# Altium PCB Audio Amplifier 3W PAM8403 PCB.PcbDoc
Units mil, origin at the board's own origin, x right, y up, seen from the top; angles counter-clockwise.
Board outline 1181.1 x 1181.1 mil, 2 copper layers (Top Layer, Bottom Layer); 13 components, 16 nets, 48 pads, 11 vias.
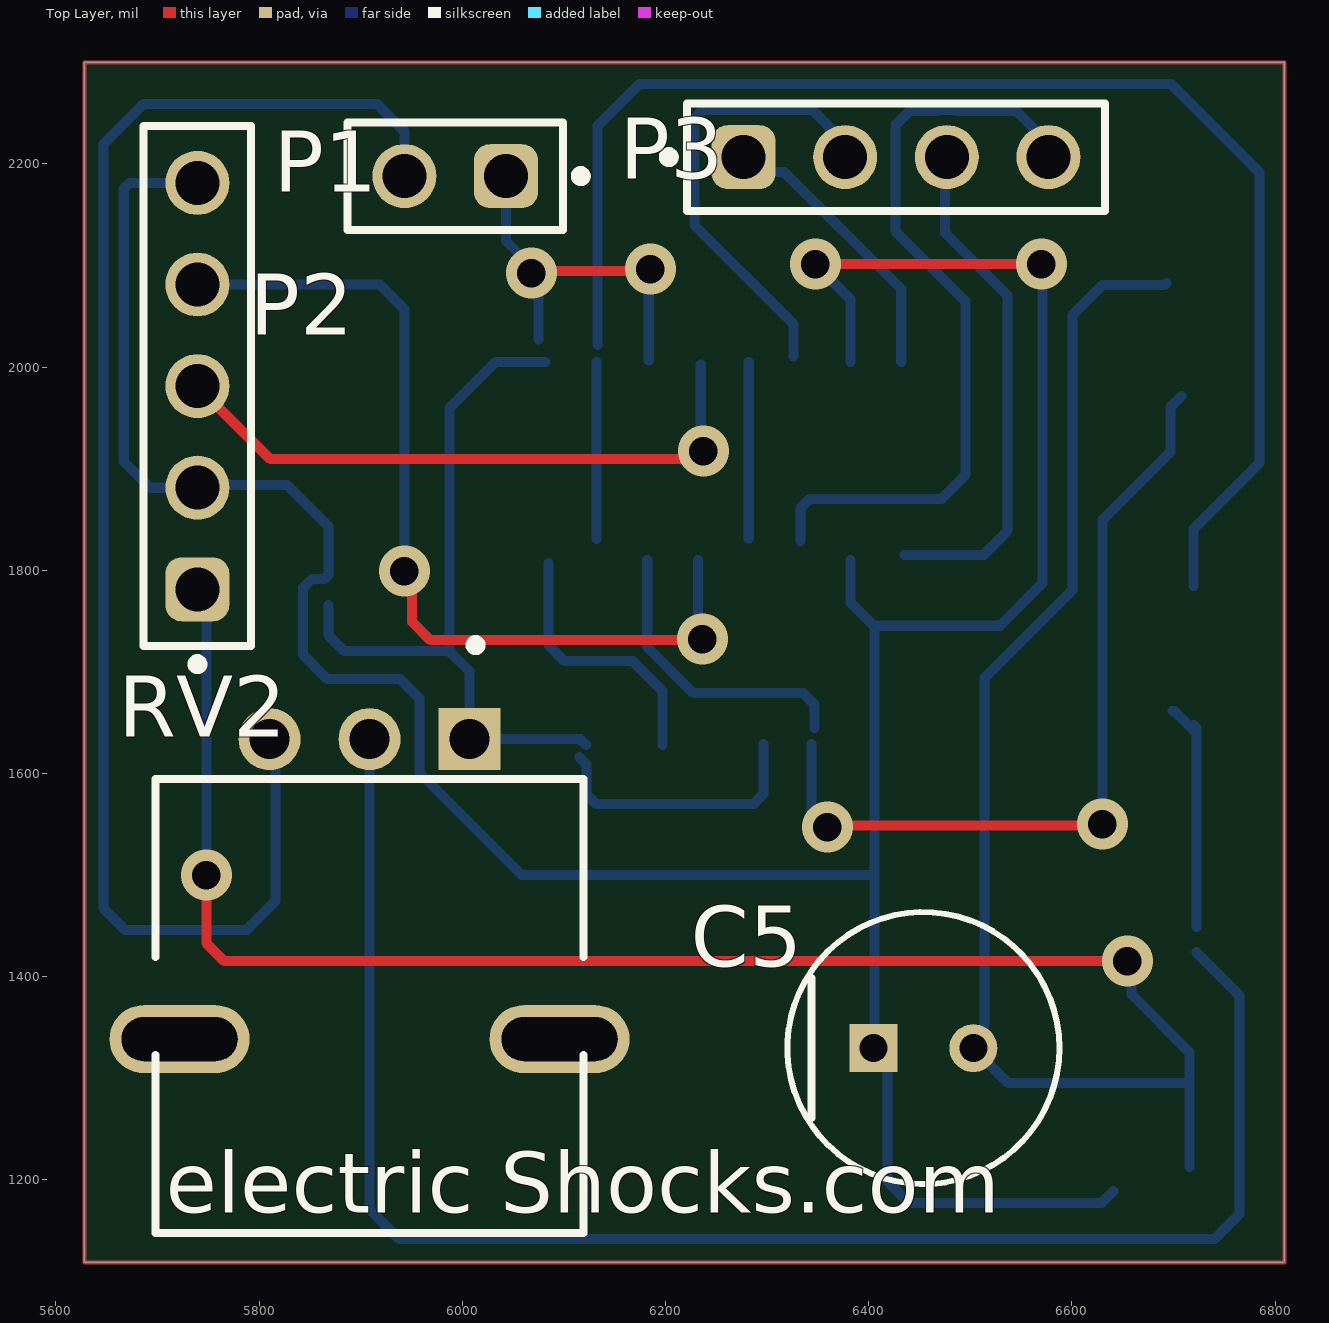
[diagram p0: Top Layer view]
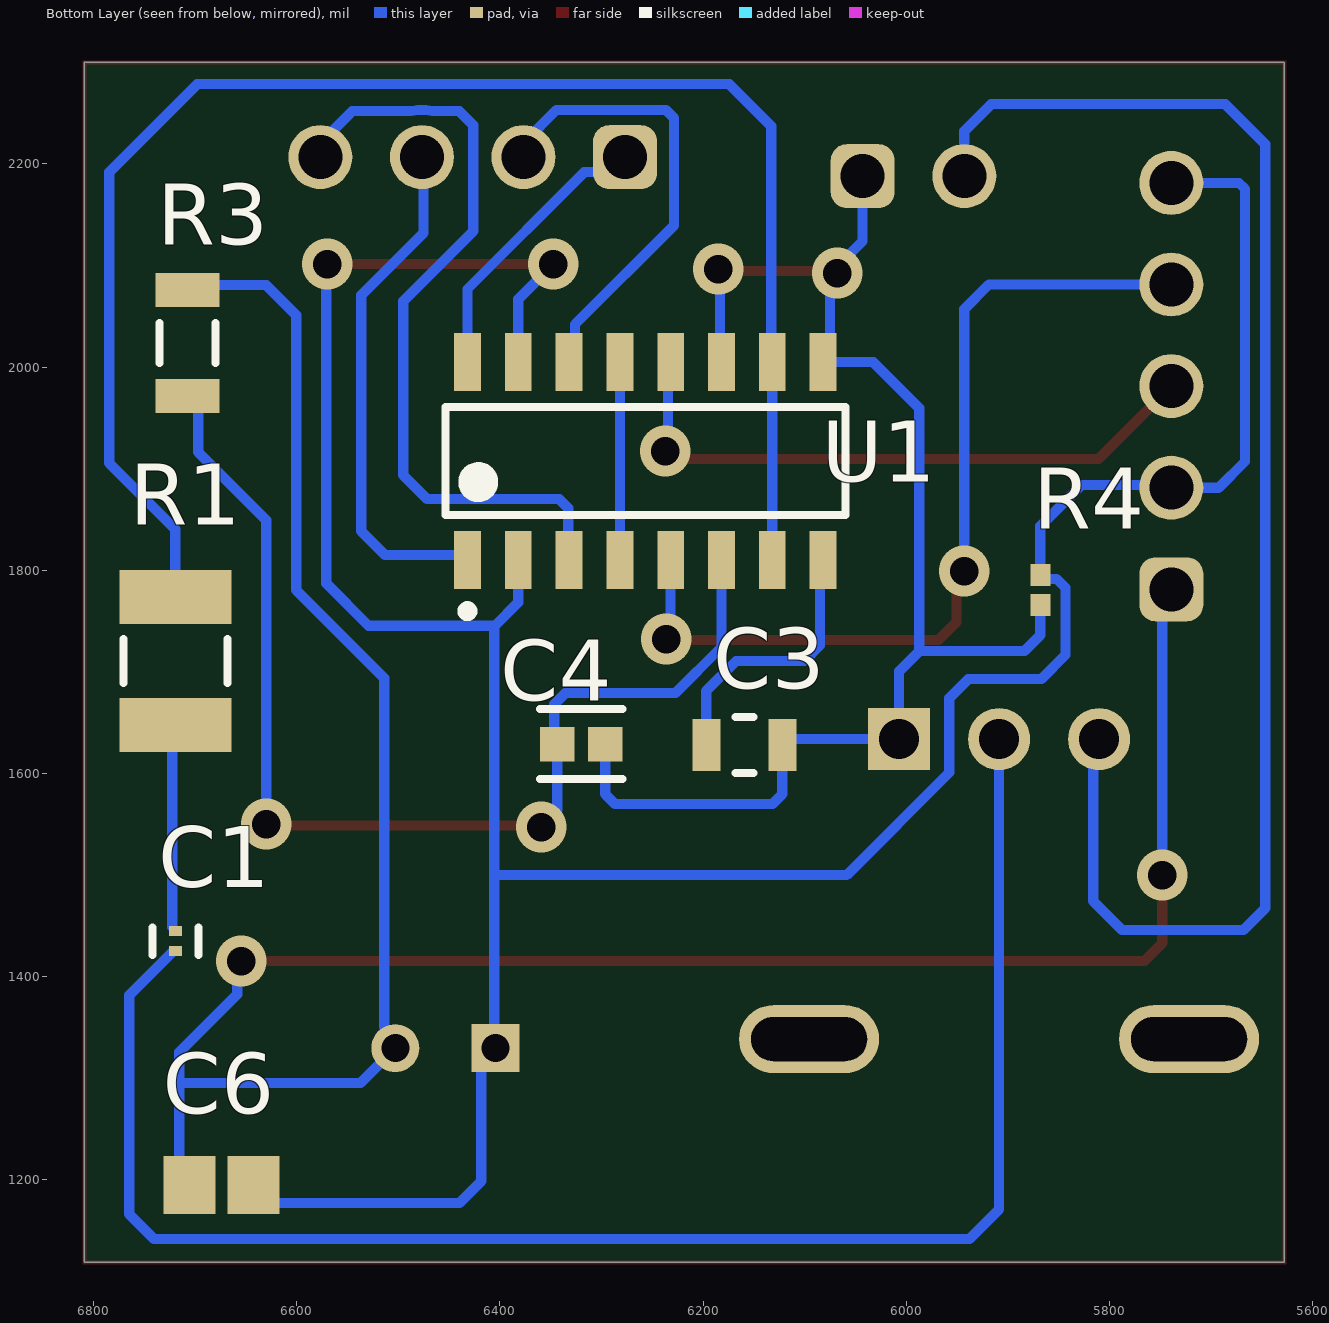
[diagram p1: Bottom Layer view, seen from below]
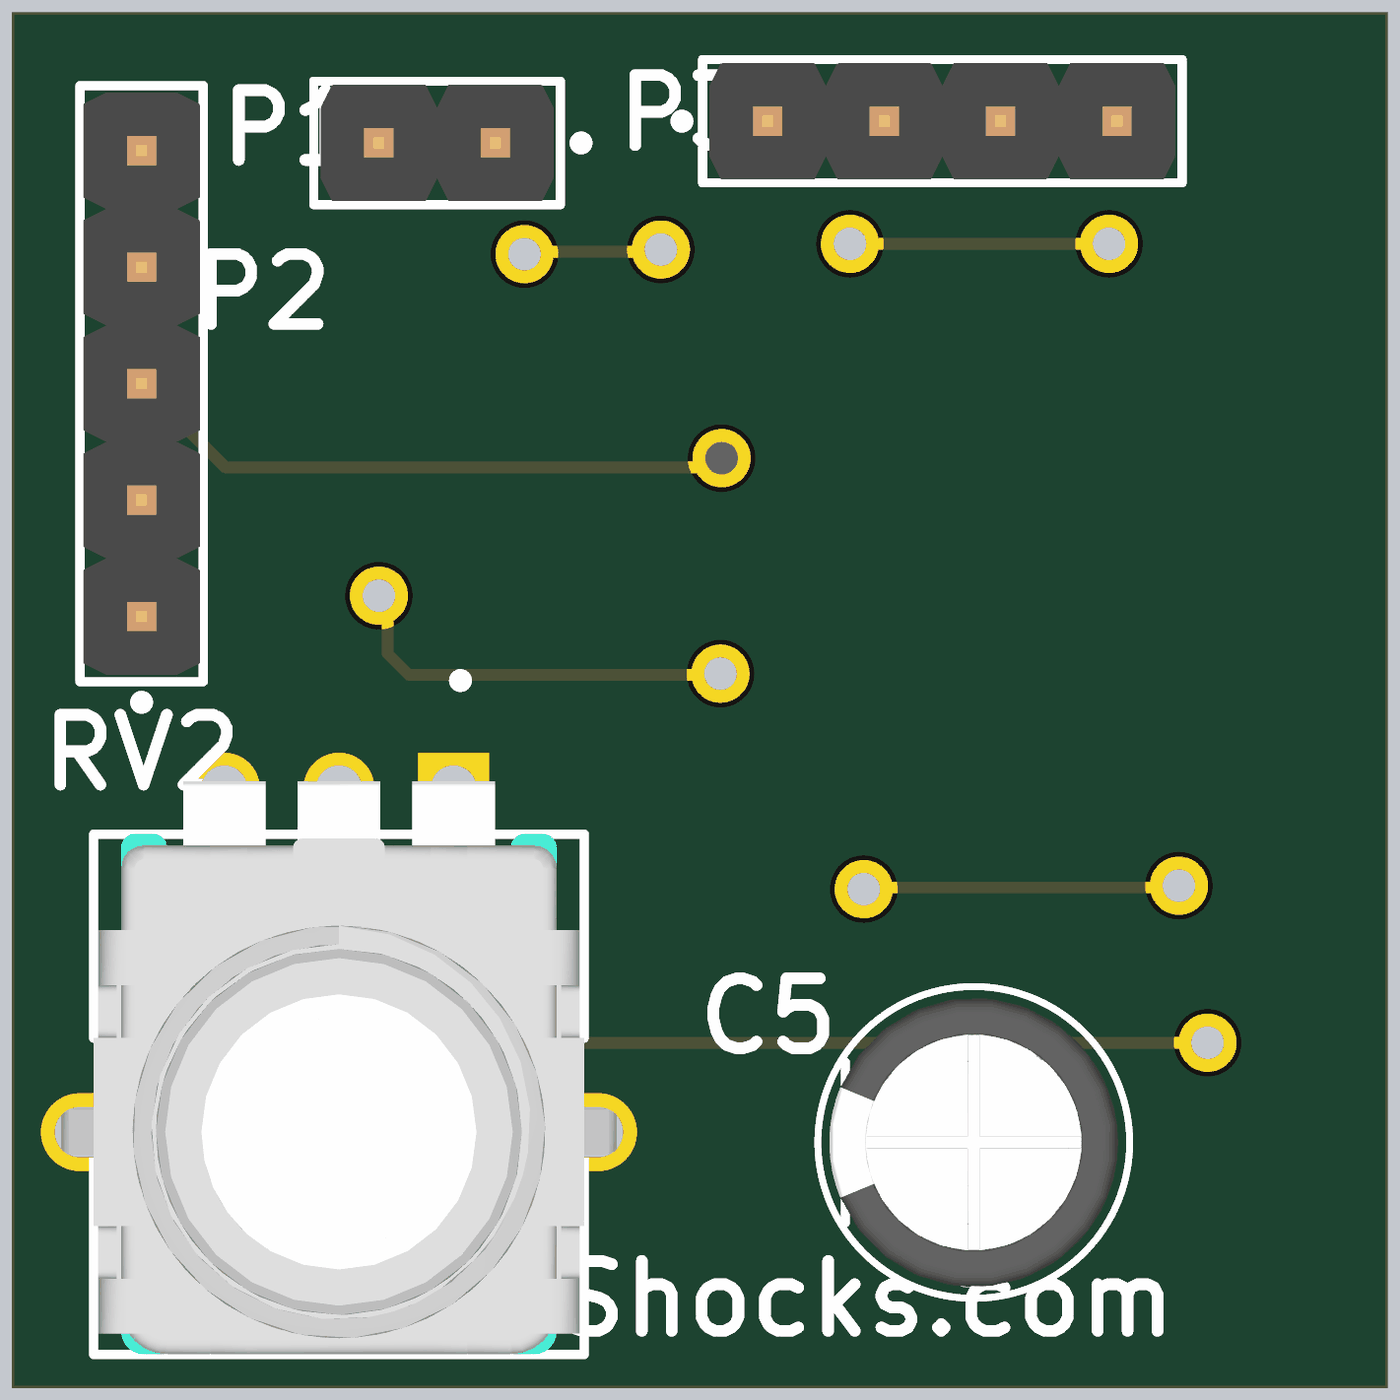
[diagram p2: 3D render of the assembled board from above, using the file's embedded part models]

## Layer stack, top to bottom
Top Solder: solder mask 0.4, Solder Resist, Dk 3.5
Top Layer: signal copper 1.4
Dielectric 1: dielectric 12.6, FR-4, Dk 4.8
Bottom Layer: signal copper 1.4
Bottom Solder: solder mask 0.4, Solder Resist, Dk 3.5

## Board outline
5627.9,1118.9 5627.9,2300 6809,2300 6809,1118.9

## Design rules (kind name [scope] priority, off if disabled: settings)
Clearance [All] p1: gap=10 ignorepadtopadclearanceinfootprint=FALSE except(0: Arc-Hole Track-Hole SMDPad-Hole THPad-Hole Via-Hole Fill-Hole Poly-Hole Region-Hole Text-Hole)
PolygonConnect [All] p1: connectstyle=Relief reliefconductorwidth=10 reliefentries=4 polygonreliefangle="90 Angle" airgapwidth=10
RoomDefinition "Audio Amplifier 3W PAM8403 Schematics Layout" [InComponentClass('Audio Amplifier 3W PAM8403 Schematics Layout')] p1: confinementstyle=ConfineIn formatcopy=TRUE lockcomponents=FALSE outline 7045,1060 11515,1060 11515,1775 7045,1775
RoutingVias [All] p1: holewidth=28 width=50 viastyle="Through Hole" minholewidth=28 minwidth=50 maxholewidth=28 maxwidth=50
SolderMaskExpansion [All] p1: expansion=4 istentingtop=FALSE
Width [All] p1: maxlimit=10 minlimit=10 preferedwidth=10
30 further rules are at their usual default settings.

## Classes and differential pairs
component class "Audio Amplifier 3W PAM8403 Schematics Layout": C1 C3 C4 C5 C6 P1 P2 R1 R3 R4 RV2 U1

## Components (designator, comment, footprint, x,y, rotation, side; value= is the part's Value field where it differs from the comment)
C1 "LMK063BC6474MPLF" FP-0201-L_0_6_0_09-W_0_3-MFG 6719.49,1435.04 r90 bottom
C3 "GCD21BR72A104MA01L" FP-GCD21B-0_15-MFG 6159.45,1627.95 r180 bottom
C4 "GRM188R61A106ME69J" FP-GRM188-0_15-IPC_C 6319.88,1628.94 r180 bottom
C5 "EEUFM1E101B" FP-RAD-TH-D_6_3_0_5-L_11-MFG 6453.74,1329.72 r0 top
C6 "0805YD105MAT2A" CAPC2013X140X50NL20T25 6674.21,1194.88 r0 bottom
P1 "61300211121" 61300211121 5992.91,2187.99 r180 top
P2 "61300511121" 61300511121 5739.17,1981.3 r90 top
P3 "61300411121" 61300411121 6426.77,2206.69 r0 top
R1 "20K 5% 1210(3225)" RESC1210(3225)_M 6719.49,1710.63 r90 bottom value="20000.00 Ohm"
R3 "RC1206FR-1010RL" RESC3116X65X40LL10T20 6707.68,2023.62 r90 bottom
R4 "SG73S1ETTP1R0J" RESC1005X40X25LL10T10 5868.11,1780.51 r90 bottom
RV2 "RK09L1140A2U" FP-RK09L1140A2U-MFG 5908.63,1371.06 r180 top value=10kΩ
U1 "PAM8403DR" FP-SO-16-MFG 6256.89,1907.48 r90 bottom locked

## Footprints (in the part's own frame and the unit in brackets; to place one, negate y for a bottom-side part, rotate by r counter-clockwise, add the part's x,y. Pads: shape width x height; smd on the part's side, far side on the other; paste and mask are expansions set on the pad)
61300211121 [mm] "Pin Header, pitch 2.54 mm, THT, Vertical, single row, 2p"
  rrect50% 1.6x1.6 hole 1.1: 1(-1.27,0)
  round 1.6 hole 1.1: 2(1.27,0)
  silkscreen extent -3.26,-1.35 2.69,1.35, body extent -2.54,-1.27 2.54,1.27, height 8.57
61300411121 [mm] "Pin Header, pitch 2.54 mm, THT, Vertical, single row, 4p"
  rrect50% 1.6x1.6 hole 1.1: 1(-3.81,0)
  round 1.6 hole 1.1: 2(-1.27,0) 3(1.27,0) 4(3.81,0)
  silkscreen extent -5.8,-1.35 5.23,1.35, body extent -5.08,-1.27 5.08,1.27, height 8.57
61300511121 [mm] "Pin Header, pitch 2.54 mm, THT, Vertical, single row, 5p"
  rrect50% 1.6x1.6 hole 1.1: 1(-5.08,0)
  round 1.6 hole 1.1: 2(-2.54,0) 3(0,0) 4(2.54,0) 5(5.08,0)
  silkscreen extent -7.07,-1.35 6.5,1.35, body extent -6.35,-1.27 6.35,1.27, height 8.57
CAPC2013X140X50NL20T25 [mm] "Chip Capacitor, 2-Leads, Body 2.00x1.25mm, IPC Medium Density"
  rect 1.3x1.45 smd: 1(-0.8,0) 2(0.8,0)
  body extent -1.1,-0.72 1.1,0.72, height 1.4
FP-0201-L_0_6_0_09-W_0_3-MFG [mm]
  rect 0.25x0.325 smd paste+0 mask+0: 1(-0.25,0) 2(0.25,0)
  silkscreen extent -0.35,-0.59 0.35,0.58, body extent -0.3,-0.15 0.3,0.15, height 0.39
FP-GCD21B-0_15-MFG [mm]
  rect 0.7x1.3 smd paste+0 mask+0: 1(-0.95,0) 2(0.95,0)
  silkscreen extent -0.23,-0.7 0.23,0.7, body extent -1,-0.63 1,0.63, height 1.4
FP-GRM188-0_15-IPC_C [mil]
  rect 33.71x33.79 smd paste+0 mask+0: 1(-23.66,0) 2(23.66,0)
  silkscreen extent -41,-34 41,34
FP-RAD-TH-D_6_3_0_5-L_11-MFG [mm]
  rect 1.2x1.2 hole 0.7 paste-1000 mask+0: 1(-1.25,0)
  round 1.2 hole 0.7 paste-1000 mask+0: 2(1.25,0)
  silkscreen extent -3.4,-3.4 3.4,3.4, body extent -3.5,-3.5 3.5,3.5, height 0.25
FP-RK09L1140A2U-MFG [mm]
  rect 1.55x1.55 hole 1 paste-1000 mask+0: 1(-2.5,-6.675)
  round 1.55 hole 1 paste-1000 mask+0: 2(0,-6.675) 3(2.5,-6.675)
  rrect100% 3.5x1.7 hole 1.1 slot 2.9 at 0 deg paste-1000 mask+0: 4(-4.75,0.825) 5(4.75,0.825)
  silkscreen extent -5.35,-9.15 5.35,5.68, body extent -6.6,-7.55 6.6,5.77, height 0.25
FP-SO-16-MFG [mm]
  rect 1.45x0.67 smd paste+0 mask+0: 1(-2.475,4.445) 2(-2.475,3.175) 3(-2.475,1.905) 4(-2.475,0.635) 5(-2.475,-0.635) 6(-2.475,-1.905) 7(-2.475,-3.175) 8(-2.475,-4.445) 9(2.475,-4.445) 10(2.475,-3.175) 11(2.475,-1.905) 12(2.475,-0.635) 13(2.475,0.635) 14(2.475,1.905) 15(2.475,3.175) 16(2.475,4.445)
  silkscreen extent -3.87,-5 1.35,5, body extent -3,-4.95 3,4.95, height 1.75
RESC1005X40X25LL10T10 [mm] "Chip Resistor, 2-Leads, Body 1.00x0.50mm, IPC High Density"
  rect 0.55x0.5 smd: 1(-0.375,0) 2(0.375,0)
  body extent -0.55,-0.3 0.55,0.3, height 0.4
RESC1210(3225)_M [mm] "Chip Resistor, Body 3.2x2.5mm, IPC Low Density"
  rect 1.35x2.8 smd: 1(-1.6,0) 2(1.6,0)
  silkscreen extent -0.55,-1.3 0.55,1.3, body extent -1.7,-1.35 1.7,1.35, height 0.71
RESC3116X65X40LL10T20 [mm] "Chip Resistor, 2-Leads, Body 3.10x1.60mm, IPC High Density"
  rect 0.85x1.6 smd: 1(-1.325,0) 2(1.325,0)
  silkscreen extent -0.5,-0.7 0.5,0.7, body extent -1.6,-0.85 1.6,0.85, height 0.65

## Part data
C1: library part CMP-14477-002327-2, "0.47 µF ±20% 10V Ceramic Capacitor X6S 0201 (0603 Metric)", RoHS Compliant=Yes
C3: library part CMP-06035-062053-1, "Chip Multilayer Ceramic Capacitors for Automotive, 0805, 0.10uF, X7R, 15%, 20%, 100V, Grade 1"
C4: library part CMP-06035-033844-1, "Chip Multilayer Ceramic Capacitors for General Purpose, 0603, 10uF, X5R, 15%, 20%, 10V", Capacitance=10uF, Dielectric=X5R, Tolerance=20%, Voltage Rating (DC)=10V, Length=1.6mm, Thickness=800um, Width=800um
C5: library part CMP-05427-000856-1, "Aluminum Electrolytic Capacitors (Radial Lead Type) 100uF ±20% 25V", Capacitance=100uF, Case/Package=Radial, ESR (Equivalent Series Resistance)=130mR, Max Operating Temperature=105°C, Min Operating Temperature=-40°C, Package Quantity=2000, Ripple Current=455mA, Tolerance=20%, Voltage Rating=25V, Diameter=6mm, Height - Seated (Max)=0.5inch, Impedance=130mR, Lead Diameter=0.5mm, Lead Pitch=5mm, Length=11mm, Life (Hours)=2000Hour, Mount="Through Hole", Packaging="Tape and Reel", Polarity=Polar, RoHS Compliant=Yes, Series=FM, Termination=Radial, Voltage Rating (DC)=25V
C6: library part CMP-2007-04663-1, "1 µF ±20% 16V Ceramic Capacitor X5R 0805 (2012 Metric)", Manufacturer="AVX Interconnect / Elco", Part Number=0805YD105MAT2A
P1: library part CMP-1712-00002-7, "THT Vertical Pin Header WR-PHD, Pitch 2.54 mm, Single Row, 2 pins", Color=Black, Contact Resistance=20mΩ, Current Rating=3A, Max Operating Temperature=105°C, Min Operating Temperature=-40°C, Operating Supply Voltage=250V, Connector Type="Male Pin", Contact Gender=Male, Contact Material=Gold, Contact Mating Length=5.9944mm, Contact Plating=Gold, Gender=Male, Height=8.94mm, Housing Material=PBT, Lead Free="Lead Free", Lead Pitch=2.54mm, Mount="Through Hole", Number Of Contacts=2, Number of Pins=2, Number of Positions=2, Number of Rows=1, Orientation=Vertical, Packaging=Bulk, Pitch=2.54mm, REACH SVHC=No, RoHS=Compliant, Termination="Through Hole", Voltage Rating=250V
P2: library part CMP-1502-01068-4, "THT Vertical Pin Header WR-PHD, Pitch 2.54 mm, Single Row, 5 pins", Color=Black, Contact Resistance=20mΩ, Current Rating=3A, Max Operating Temperature=105°C, Min Operating Temperature=-40°C, Operating Supply Voltage=250V, Connector Type="Male Pin", Contact Material=Gold, Contact Mating Length=5.9944mm, Contact Plating=Gold, Gender=Male, Height=8.89mm, Lead Free="Lead Free", Lead Pitch=2.54mm, Mount="Through Hole", Number Of Contacts=5, Number of Pins=5, Number of Positions=5, Number of Rows=1, Orientation=Vertical, Packaging=Bulk, Pitch=2.54mm, RoHS=Compliant, Termination=Solder, Voltage Rating=250V
P3: library part CMP-1502-01064-4, "THT Vertical Pin Header WR-PHD, Pitch 2.54 mm, Single Row, 4 pins", Color=Black, Contact Resistance=20mΩ, Current Rating=3A, Max Operating Temperature=105°C, Min Operating Temperature=-40°C, Operating Supply Voltage=250V, Connector Type="Male Pin", Contact Material=Gold, Contact Mating Length=5.9944mm, Contact Plating=Gold, Gender=Male, Height=8.89mm, Lead Free="Lead Free", Lead Pitch=2.54mm, Mount="Through Hole", Number Of Contacts=4, Number of Pins=4, Number of Positions=4, Number of Rows=1, Orientation=Vertical, Packaging=Bulk, Pitch=2.54mm, RoHS=Compliant, Termination=Solder, Voltage Rating=250V
R1: library part CMP-1015-00105-1, "20K 0.5W 5% 1210 (3225 Metric)  SMD", Case-EIA=1210, Case-Metric=3225, Power="0.5 W", Tolerance="5 %", Technology=SMT
R3: library part CMP-2003-03446-1, Manufacturer=Yageo, Part Number=RC1206FR-1010RL
R4: library part CMP-2002-04124-1, Manufacturer="KOA Speer", Part Number=SG73S1ETTP1R0J
RV2: library part CMP-24118-000002-1, "9mm Size Metal Shaft Snap-in Type RK09L Series", Manufacturer=ALPS, Power Rating=0.05W, Resistance=10kΩ, Temperature="-10°C to +70°C", Temperature Range High=+70°C, Temperature Range Low=-10°C, Tolerance=20%, Voltage Rating=50V, Automotive=No, Category=Res, ComponentLink2Description=Datasheet, ComponentLink2URL=https://www.alps.com/prod/info/E/HTML/Potentiometer/RotaryPotentiometers/RK09L/RK09L1140A2U.html, Device Class L1="Passive Components", Device Class L2=Resistors, Device Class L3="Variable Resistors and Potentiometers", Height=30mm, Lead Free=Yes, Manufacturer Part Number=RK09L1140A2U, Octopart=https://octopart.com/rk09l1140a2u-alps-7850070, Package=RK09L1140A2U, RoHS=TRUE, Series=RK09L, Standoff Height=2.55mm
U1: library part CMP-12733-000001-1, "IC AMP CLASS D STEREO 3W 16SOP", Manufacturer="Diodes Inc.", Max Junction Temp=+125°C, Max Supply Voltage=5.5V, Min Supply Voltage=2.5V, Nominal Supply Current=8-16mA, Package=SO-16, Power At Speaker R="3.2W @ 4Ω", Temperature="-40°C to +85°C", Temperature Range High=+85°C, Temperature Range Low=-40°C, Automotive=No, Category=IC, ComponentLink2Description=Datasheet, ComponentLink2URL=https://www.diodes.com/assets/Datasheets/PAM8403.pdf, Device Class L1="Integrated Circuits (ICs)", Device Class L2="Linear ICs", Device Class L3="Amplifiers - Audio", Digikey Description="IC AMP CLASS D STEREO 3W 16SOP", Footprint Url=https://www.diodes.com/assets/Package-Files/SO-16.pdf, Height=1.26mm, Ipc Land Pattern Name=SOIC127P600X119-16, Lead Free=Yes, Manufacturer Part Number=PAM8403DR, Mouser Description="PAM8403 Series 5.5 V 3 W Filterless Class-D Stereo Audio Amplifier - SOIC-16", Number Of Channels=2, Octopart=https://octopart.com/pam8403dr-diodes+inc.-29030487, RoHS=TRUE, Standoff Height=0.1mm

## Via types
v1: diameter 50, hole 28, Top Layer to Bottom Layer, 11 vias

## Nets (pads, with @x,y where several pads share a name; then routed paths per layer and width w, separated by ;. In a path a pad name is that pad's centre, name@x,y a point inside that pad or via, vN(x,y) a via of type N, cw(c..) or ccw(c..) an arc to the next point about the centre after c; other vN are vias at no path point)
NetC1_1: C1.1 RV2.2 | length 1616.7
  Bottom Layer w10: RV2.2 5908.63,1171.09 5937.99,1141.73 6740.16,1141.73 6764.76,1166.34 6764.76,1381.89 C1.1@6722.44,1424.21
NetC1_2: C1.2 R1.1 | length 228.4
  Bottom Layer w10: R1.1@6698.82,1661.42 6700.87,1661.42 R1.1@6719.49,1642.8 ; R1.1 6722.44,1644.68 C1.2@6722.44,1448.82
NetC3_1: C3.1 U1.8 | length 264.8
  Bottom Layer w10: U1.8@6084.93,1807 6084.93,1726.09 6100.39,1710.63 6167.58,1710.63 6196.85,1681.36 C3.1
NetC3_2: C3.2 C4.2 P1.1 R4.1 RV2.1 U1.9 U1.11 | length 1374.2
  Top Layer w10: v1(6067.91,2092.52) 6069.88,2094.49 6183.07,2094.49 v1(6185.04,2096.46)
  Bottom Layer w10: R4.1 5868.11,1736.22 5883.86,1720.47 5987.2,1720.47 ; P1.1 6042.91,2124.09 6067.91,2099.09 v1(6067.91,2092.52) 6074.9,2085.53 U1.9@6074.9,2027.26 ; U1.9 6032.48,2004.92 5987.2,1959.65 5987.2,1720.47 ; C3.2@6115.16,1616.14 6122.05,1609.25 6122.05,1579.72 6131.89,1569.88 6286.42,1569.88 6296.22,1579.69 C4.2 ; C3.2 6116.14,1633.86 RV2.1 6007.06,1700.62 5987.2,1720.47 ; U1.11@6183.46,2006.5 6183.46,2094.88 v1(6185.04,2096.46)
NetC4_1: C4.1 R3.1 U1.6 | length 1087.3
  Top Layer w10: v1(6359.25,1547.24) 6360.73,1548.72 6628.44,1548.72 v1(6629.92,1550.2)
  Bottom Layer w10: U1.6 6181.89,1724.61 6227.36,1679.13 6335.63,1679.13 6346.46,1668.31 C4.1@6346.46,1644.68 ; v1@6343.54,1563.94 C4.1 ; v1(6629.92,1550.2) 6629.92,1849.36 6696.85,1916.29 6696.85,1960.63 R3.1
NetC5_1: C5.1 C6.1 P2.2 P2.5 R4.2 U1.2 U1.15 | length 3080.1
  Top Layer w10: v1(6347.44,2101.38) v1(6569.88,2101.38)
  Bottom Layer w10: P2.2@5726.38,1882.87 5724.8,1881.3 5692.52,1881.3 5666.65,1907.17 5666.65,2175.44 5672.51,2181.3 P2.5 ; P2.2@5746.06,1885.83 5748.03,1883.86 5827.76,1883.86 5868.11,1843.5 R4.2 5864.41,1791.57 5852.05,1791.57 5843.27,1782.79 5843.27,1716.77 5867.13,1692.91 5938.98,1692.91 5957.68,1674.21 5957.68,1601 6058.68,1500 6405.51,1500 ; v1(6347.44,2101.38) 6381.89,2066.93 U1.15 ; U1.2 6381.89,1768.44 6404.84,1745.49 6529.21,1745.49 6570.87,1787.14 6570.87,2100.39 v1(6569.88,2101.38) ; C5.1@6400.59,1338.58 6405.51,1343.5 6405.51,1500 ; C5.1 6418.31,1315.94 6418.31,1198.82 6439.96,1177.17 6628.94,1177.17 C6.1@6640.75,1188.98 ; 6405.51,1745.49 6405.51,1500
NetC5_2: C5.2 C6.2 P2.1 R3.2 | length 2576.3
  Top Layer w10: v1(5748.03,1500) 5748.03,1433.07 5765.75,1415.35 v1(6654.53,1415.35)
  Bottom Layer w10: v1(5748.03,1500) P2.1@5748.03,1772.44 ; v1(6654.53,1415.35) 6658.54,1411.34 6658.54,1382.8 6715.55,1325.79 6715.55,1295.28 C6.2@6715.55,1212.6 ; R3.2@6692.91,2082.68 6690.94,2080.71 6629.92,2080.71 6600.39,2051.18 6600.39,1780.51 6513.78,1693.9 6513.78,1350.63 6502.95,1339.8 C5.2 6537.4,1295.28 6713.63,1295.28 6715.55,1293.35
NetP1_2: P1.2 RV2.3 | length 1466.4
  Bottom Layer w10: RV2.3@5815.94,1630.91 5815.94,1474.41 5787.4,1445.87 5668.31,1445.87 5646.65,1467.52 5646.65,2219.49 5686.02,2258.86 5916.34,2258.86 5942.91,2232.28 P1.2
NetP2_3: P2.3 U1.12 | length 611.6
  Top Layer w10: P2.3 5811.02,1909.45 6226.43,1909.45 6232.28,1915.31 6232.28,1916.34 v1@6234.25,1918.31
  Bottom Layer w10: v1@6233.27,1920.28 6234.55,1921.56 U1.12@6234.55,2002.26
  other v1: 6237.2,1917.32
NetP2_4: P2.4 U1.5 | length 882.1
  Top Layer w10: v1(5942.91,1799.21) 5950.43,1791.69 5950.43,1749.37 5968.5,1731.3 v1@6235.24,1731.3
  Bottom Layer w10: P2.4 5918.7,2081.3 5942.91,2057.09 v1(5942.91,1799.21) ; v1@6231.89,1744.84 U1.5
  other v1: 6236.22,1732.28
NetP3_1: P3.1 U1.16 | length 285.8
  Bottom Layer w10: P3.1@6275.86,2217.54 P3.1@6275.86,2222.44 ; P3.1 6291.57,2191.9 6316.96,2191.9 6431.89,2076.97 U1.16
NetP3_2: P3.2 U1.14 | length 437.3
  Bottom Layer w10: U1.14@6326.07,2010.74 6326.07,2042.04 6228.5,2139.61 6228.5,2245.07 6236.63,2253.19 6344.25,2253.19 P3.2@6375,2222.44
NetP3_3: P3.3 U1.1 | length 520.5
  Bottom Layer w10: U1.1@6435.04,1814.96 6512.8,1814.96 6536.42,1838.58 6536.42,2070.87 6475,2132.28 P3.3@6475,2222.44
NetP3_4: P3.4 U1.3 | length 748.3
  Bottom Layer w10: U1.3@6332.68,1828.74 6332.68,1861.22 6341.54,1870.08 6471.46,1870.08 6495.08,1893.7 6495.08,2064.96 6426.18,2133.86 6426.18,2238.19 6439.96,2251.97 6466.19,2251.97 cw(c6476.77,2206.69) 6487.36,2251.97 6545.47,2251.97 6548.4,2249.04 P3.4@6575,2222.44
NetR1_2: R1.2 U1.7 U1.10 | length 1528.7
  Bottom Layer w10: U1.7@6131.89,1830.71 U1.10 ; U1.10@6132.87,2021.65 6132.87,2237.2 6174.21,2278.54 6697.83,2278.54 6784.45,2191.93 6784.45,1905.51 6719.49,1840.55 R1.2@6719.49,1784.45
NetU1_4: U1.4 U1.13 | length 173.6
  Bottom Layer w10: U1.4@6281.89,1831.3 U1.13
pads on no net: RV2.4 RV2.5
copper on no net: | length 4724.4
  Top Layer w3.94: 5627.9,1118.9 6809,1118.9 6809,2300 5627.9,2300 5627.9,1118.9

## Silkscreen, mask and mechanical layers (free items; w line width, h text height)
Top Overlay:
  text "electric Shocks.com" at 5707.83,1167.48 h60

## Panel: embedded boards
"Audio Amplifier 3W PAM8403 PCB.PcbDoc" at 7282,2791, 1 rows x 1 columns, spacing 2500 x 1500, rotation 0